# EAGLE board base3-5pin-interface-SDA-SCL-Switch-on-output-posunute-konektory (EAGLE 7.2.0)
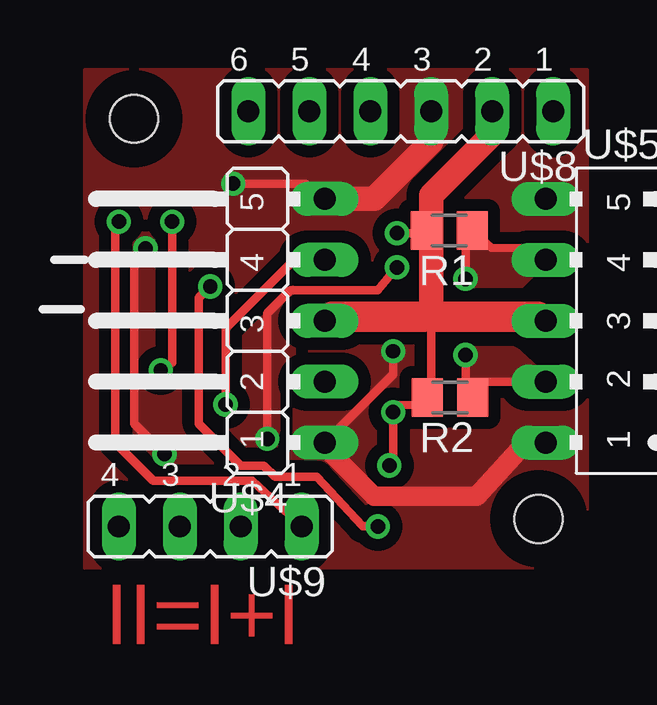
[diagram p0: board, top side]
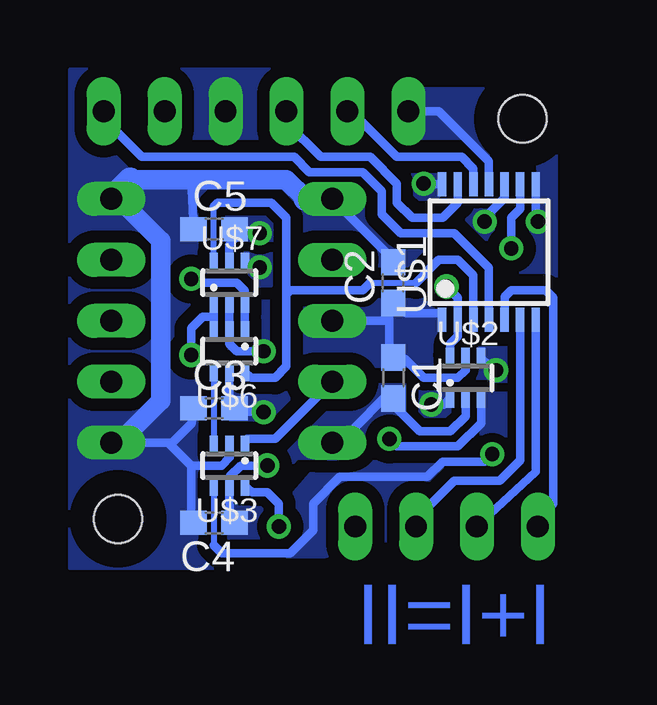
[diagram p1: board, bottom side, seen from below]

No outline drawn. Coordinates in mm, seen from the top.
Copper layers (1*16): Top 0.035mm / dielectric 1.5mm / Bottom 0.035mm
Design rules "default": minimum track width 10mil, minimum drill 24mil, track to track 8mil, track to pad 8mil, pad to pad 8mil, via to via 8mil, smd to smd 8mil, copper to edge 40mil, drill to drill 8mil, minimum pad ring 10mil, minimum via ring 8mil, stop-mask expansion 4mil, vias tented up to drill 0mil, thermal gap 10mil
Holes 2 mm at 2.06,18.89 18.92,2.22

## Footprints (pad centres in the part's own frame; a part is rotated, then mirrored left to right if it is on the bottom)
C0603 = smd 1.1 x 1: 1 -0.85,0; 2 0.85,0
M0805 = smd 1.3 x 1.6: 1 -0.95,0; 2 0.95,0
TSSOP14 = smd 0.35 x 1: 1 -1.95,-2.825; 2 -1.3,-2.825; 3 -0.65,-2.825; 4 0,-2.825; 5 0.65,-2.825; 6 1.3,-2.825; 7 1.95,-2.825; 8 1.95,2.825; 9 1.3,2.825; 10 0.65,2.825; 11 0,2.825; 12 -0.65,2.825; 13 -1.3,2.825; 14 -1.95,2.825
SC70-6L = smd 0.35 x 0.8: 1 -0.65,-0.85; 2 0,-0.85; 3 0.65,-0.85; 4 0.65,0.85; 5 0,0.85; 6 -0.65,0.85
JUMPER5 = drill 0.914 long: 1 -5.08,-2.54; 2 -2.54,-2.54; 3 0,-2.54; 4 2.54,-2.54; 5 5.08,-2.54
JUMPER5F = drill 0.914 long: 1 5.08,-2.54; 2 2.54,-2.54; 3 0,-2.54; 4 -2.54,-2.54; 5 -5.08,-2.54
JUMPER6M = drill 0.914 long: 1 -6.35,0; 2 -3.81,0; 3 -1.27,0; 4 1.27,0; 5 3.81,0; 6 6.35,0
JUMPER4M = drill 0.914 long: 1 -3.81,0; 2 -1.27,0; 3 1.27,0; 4 3.81,0

## Placement (x,y rotation side)
C1  100nF  [C0603]  7.46,8.1 270 bottom
C2  100nF  [C0603]  7.46,12.06 90 bottom
C3  100nF  [C0603]  14.92,6.83 0 bottom
C4  100nF  [C0603]  14.92,2.06 180 bottom
C5  100nF  [C0603]  14.92,14.29 0 bottom
R1  4k7  [M0805]  15.2,14.24 180 top
R2  4k7  [M0805]  15.23,7.28 180 top
U$1  16F103-TSSOP  [TSSOP14]  3.47,13.34 0 bottom
U$2  NC7SB3157P6X  [SC70-6L]  4.45,8.1 0 bottom
U$3  NC7SB3157P6X  [SC70-6L]  14.29,4.45 180 bottom
U$4  JUMPER5  [JUMPER5]  7.46,10.48 90 top
U$5  JUMPER5F  [JUMPER5F]  21.75,10.48 270 top
U$6  NC7SB3157P6X  [SC70-6L]  14.29,9.21 180 bottom
U$7  NC7SB3157P6X  [SC70-6L]  14.29,12.06 0 bottom
U$8  JUMPER6M  [JUMPER6M]  13.18,19.21 180 top
U$9  JUMPER4M  [JUMPER4M]  5.24,1.91 180 top

## Library data of the parts
C1-C5 R1 R2 = resistor
U$1-U$9 = !stavebnice03

## Nets
GND: C1.2 C2.2 C3.1 C4.2 C5.1 U$1.14 U$2.2 U$3.2 U$4.1 U$4.5 U$5.1 U$5.5 U$6.2 U$7.2 U$8.3
N$1: U$1.3 U$6.6 U$7.6
N$2: U$1.10 U$2.4
N$4: U$1.9 U$3.4
N$5: U$2.1 U$4.4
N$6: R1.1 U$5.4 U$6.1 U$7.3
N$7: U$3.3 U$6.4
N$8: U$3.1 U$4.2
N$9: U$1.2 U$2.6 U$3.6
N$10: R2.1 U$5.2 U$6.3 U$7.1
N$11: U$1.11 U$8.6
N$12: U$1.5 U$9.4
N$13: U$1.4 U$8.1
N$14: U$1.13 U$8.4
N$15: U$1.12 U$8.5
N$16: U$1.7 U$9.3
N$17: U$1.6 U$9.2
N$18: U$1.8 U$9.1
N$20: U$2.3 U$7.4
VCC: C1.1 C2.1 C3.2 C4.1 C5.2 R1.2 R2.2 U$1.1 U$2.5 U$3.5 U$4.3 U$5.3 U$6.5 U$7.5 U$8.2

## Tracks (layer width: path | path; a pad name or v marks a point on that pad's centre or on a via)
GND  (via drill 0.6)
  Top 0.356: 10.95,15.56 U$4.5 9.21,16.19 v6.19,16.19 | 10.48,5.4 U$4.1 | U$4.1 10.32,4.92 | 18.1,5.08 18.1,5.4 U$5.1 | v12.86,9.21 12.86,8.26 U$4.1
  Top 0.813: 10.32,4.92 12.06,3.17 16.35,3.17 18.1,5.08
  Top 1.016: U$8.3 14.45,17.94 12.06,15.56 U$4.5
  Bottom 0.356: C5.1 15.87,16.35 15.08,16.35 | U$7.2 U$6.2 14.29,9.53 13.97,9.21 v12.86,9.21 | C3.1 15.86,6.21 16.67,5.4 16.83,5.4 | 16.83,5.4 18.89,5.4 | U$1.14 6.07,16.16 v6.19,16.19 | U$3.2 14.27,4.78 14.61,4.45 15.88,4.45 | 15.88,4.45 16.83,5.4 | U$2.2 4.45,6.51 5.08,5.87 6.35,5.87 7.3,6.83 C1.2 7.68,7.41 9.21,5.87 U$4.1 | 15.88,4.45 15.88,2.17 C4.2 | C2.2 7.52,13.07 U$4.5 | 18.73,15.4 19.05,15.4 U$5.5
  Bottom 0.813: 11.11,15.56 11.91,16.35 15.08,16.35 18.41,16.35 | 18.89,5.4 17.14,7.14 17.14,13.81 18.73,15.4
  Bottom 1.016: U$4.5 11.11,15.56 | 18.41,16.35 U$5.5 | 18.89,5.4 U$5.1
  pour Top (isolate 0.508, rank 2, no thermals): 0,0.16 0,20.95 20.95,20.95 20.95,0.16
  pour Bottom (isolate 0.508, rank 2, no thermals): 0,0.16 0,20.95 20.95,20.95 20.95,0.16
N$1
  Bottom 0.254: 8.41,12.06 6.51,12.06 | U$7.6 14.94,15.22
  Bottom 0.356: U$1.3 4.12,12.37 4.76,13.02 5.56,13.02 6.51,12.06 | 11.91,11.59 11.91,14.76 12.54,15.4 14.76,15.4 14.94,15.22 | 11.91,11.59 11.91,8.57 12.38,8.1 13.38,8.1 U$6.6 | 11.91,11.59 11.75,11.75 8.73,11.75 8.41,12.06
N$2  (via drill 0.6)
  Top 0.356: v3.17,8.41 3.65,8.73 v3.65,14.61
  Bottom 0.356: U$1.10 2.82,15.6 3.65,14.76 v3.65,14.61 | U$2.4 3.71,8.79
  Bottom 0.406: 3.71,8.79 v3.17,8.41
  pour Bottom (isolate 0.508, no thermals): 3.02,15.4 3.02,12.7 4.92,14.61 4.13,15.4
  pour Bottom (isolate 0.356, no thermals): 2.7,7.94 3.97,7.94 3.97,9.37 2.7,9.37
N$4  (via drill 0.6)
  Top 0.356: v2.54,13.49 2.06,12.86 2.06,6.19 v3.33,4.92
  Bottom 0.254: U$3.4 14.94,1.13
  Bottom 0.356: U$1.9 2.17,15.13 2.54,14.76 v2.54,13.49 | v3.33,4.92 3.65,4.6 5.4,4.6 6.03,3.97 9.68,3.97 10.79,2.86 10.79,1.75 11.75,0.79 14.61,0.79 14.94,1.13
  pour Top (isolate 0.508): 3.49,3.81 6.99,3.81 4.45,6.03 4.29,6.35 4.29,8.26 3.49,8.26 3.65,14.13 1.75,14.13 1.75,5.56
  pour Bottom (isolate 0.508, no thermals): 5.4,4.6 10.48,4.6 11.59,3.33 11.91,3.02 11.91,0.64 10.32,0.64 5.4,1.91
N$5  (via drill 0.6)
  Top 0.356: v5.87,6.99 5.87,10.16 8.73,13.02 U$4.4
  Bottom 0.356: v5.87,6.99 5.36,6.99 U$2.1
  pour Bottom (isolate 0.356, no thermals): 5.08,7.78 6.35,7.78 6.35,6.67 6.19,6.51 5.08,6.51
N$6  (via drill 0.6)
  Top 0.356: U$5.4 19.21,13.29 19,13.5 16.94,13.52 16.72,13.74 R1.1 16.03,14.22 15.88,13.97 v15.88,12.22
  Bottom 0.356: U$6.1 U$7.3 13.64,11.73 13.97,12.06 15.72,12.06 v15.88,12.22
  pour Top (isolate 0.508, no thermals): 15.88,11.91 18.26,11.91 19.21,12.86 19.21,13.49 15.88,13.49
N$7
  Bottom 0.254: U$6.4 U$3.3
N$8
  Bottom 0.356: U$4.2 12.38,5.56 13.55,5.56 U$3.1
N$9  (via drill 0.6)
  Top 0.356: v12.22,1.91 11.59,1.91 9.68,3.97 7.94,3.97 7.46,4.45 6.51,4.45 4.76,6.19 4.76,11.43 v5.24,11.91
  Bottom 0.356: v5.24,11.91 4.77,11.44 U$1.2 4.77,9.84 5.08,9.53 5.08,9.28 U$2.6 | v12.22,1.91 12.22,2.86 12.7,3.33 13.32,3.33 U$3.6
N$10  (via drill 0.6)
  Top 0.356: 15.88,7.94 15.88,7.23 R2.1 | U$5.2 15.88,7.94 | 15.88,7.94 v15.88,9.05
  Bottom 0.356: U$6.3 14.94,10.64 | 14.94,10.64 U$7.1 | v15.88,9.05 15.88,10.16 15.4,10.64 14.94,10.64
  pour Top (isolate 0.508, no thermals): 15.88,9.37 17.94,9.37 19.53,7.94 15.88,7.94
N$11
  Bottom 0.356: U$1.11 3.47,17.12 5.56,19.21 U$8.6
  pour Bottom (isolate 0.508, no thermals): 7.3,20.16 3.49,20.16 3.49,16.51 4.92,17.94 7.3,17.94
N$12
  Bottom 0.356: U$1.5 2.82,11.47 2.54,11.75 1.11,11.75 0.79,11.43 0.79,2.86 1.43,2.22 U$9.4
N$13
  Bottom 0.356: U$1.4 3.47,12.68 4.92,14.13 7.14,14.13 7.94,14.92 7.94,15.88 8.73,16.67 10.95,16.67 11.59,17.3 17.94,17.3 19.53,18.89 U$8.1
N$14
  Bottom 0.356: U$1.13 4.77,15.39 5.4,14.76 6.67,14.76 7.3,15.4 7.3,16.19 8.41,17.3 10.48,17.3 11.91,18.73 U$8.4
N$15
  Bottom 0.356: U$1.12 4.12,16.82 4.6,17.3 7.3,17.3 8.89,18.89 9.05,18.89 U$8.5
N$16
  Bottom 0.356: U$1.7 1.52,4.2 U$9.3
N$17
  Bottom 0.356: U$9.2 6.51,2.22 4.92,3.81 3.02,3.81 2.17,4.66 U$1.6
N$18  (via drill 0.6)
  Top 0.356: v1.43,14.61 1.27,14.45 1.27,5.4 2.86,3.81 6.99,3.81 U$9.1
  Bottom 0.356: U$1.8 1.52,14.36 v1.43,14.61
  pour Bottom (isolate 0.508, no thermals): 1.75,17.94 1.75,12.86 3.02,12.86 3.02,11.75 0.64,11.75 0.64,18.1 1.59,18.1
N$20  (via drill 0.6)
  Top 0.356: v7.62,5.56 7.62,10.79 8.57,11.75 12.22,11.75 v13.02,12.7
  Bottom 0.356: v13.02,12.7 13.42,12.7 U$7.4 | U$2.3 3.79,6.21 4.76,5.24 7.3,5.24 v7.62,5.56
  pour Top (isolate 0.508): 8.73,12.7 8.73,7.78 8.1,7.78 8.1,5.24 6.51,5.24 6.03,5.56 6.03,10.16 7.62,11.75
  pour Bottom (isolate 0.356, no thermals): 3.81,7.46 3.81,5.71 3.17,5.08 2.7,5.08 2.7,7.46
  pour Bottom (isolate 0.381, no thermals): 13.65,13.34 12.54,13.34 12.54,11.91 13.18,11.91 13.65,12.38
VCC  (via drill 0.6)
  Top 0.356: v13.02,14.13 14.45,14.13 14.45,13.81 | 17.2,10.43 17.14,10.64 | 14.45,10.64 14.61,10.64 | R1.2 14.35,14.06 14.45,13.97 | 14.13,10.64 14.38,10.41 14.45,10.34 14.45,7.35 R2.2 14.28,7.13 14.13,6.99 13.04,6.96 v12.86,6.67 12.86,4.6 v12.7,4.45
  Top 0.813: 10.32,10.48 10.32,10.64 | 14.13,10.64 14.61,10.64 | 18.89,10.64 18.89,10.48 U$5.3
  Top 1.016: 14.45,10.64 14.45,13.81 14.45,13.97 14.45,14.13 14.45,15.72 16.99,18.26 U$8.2
  Top 1.27: U$4.3 10.32,10.48 | 10.32,10.64 14.13,10.64 | 14.61,10.64 17.14,10.64 18.89,10.64
  Bottom 0.356: U$7.5 14.29,13.65 13.97,13.97 C5.2 13.81,14.13 v13.02,14.13 | 14.29,7.32 C3.2 | U$6.5 14.29,7.32 | 14.29,7.32 14.15,6.69 v12.86,6.67 | C4.1 14.27,2.1 U$3.5 14.27,3.99 13.81,4.45 v12.7,4.45 | U$4.3 7.62,10.48 | 7.62,10.48 7.62,10.92 C2.1 6.91,10.79 5.56,10.79 5.42,10.66 U$1.1 | 7.62,10.48 7.62,9.11 C1.1 7.41,8.89 6.99,8.89 6.19,8.1 4.76,8.1 4.45,8.41 U$2.5
  pour Bottom (isolate 0.508, no thermals): 7.94,11.75 11.43,11.75 11.59,11.59 11.59,8.26 11.27,8.57 5.56,8.57 5.56,11.75
  pour Bottom (isolate 0.508, no thermals): 14.45,8.41 14.61,6.35 12.06,6.35 11.11,7.3 11.59,7.78 11.59,8.41
  pour Bottom (isolate 0.406, no thermals): 14.45,3.17 14.45,1.43 12.54,1.43 12.54,3.17
  pour Bottom (isolate 0.356, no thermals): 14.61,13.97 14.61,15.08 12.54,15.08 12.38,14.92 12.38,13.81 14.61,13.81

## Text on the board
Top: II=I+I
Bottom: II=I+I